# Altium PCB bee_hie_PCB.PcbDoc
Units mil, origin at the board's own origin, x right, y up, seen from the top; angles counter-clockwise.
Board outline 5575 x 5145 mil, 2 copper layers (Top Layer, Bottom Layer); 23 components, 20 nets, 106 pads, 0 vias.
Unrouted connection lines stored in the file: 49.
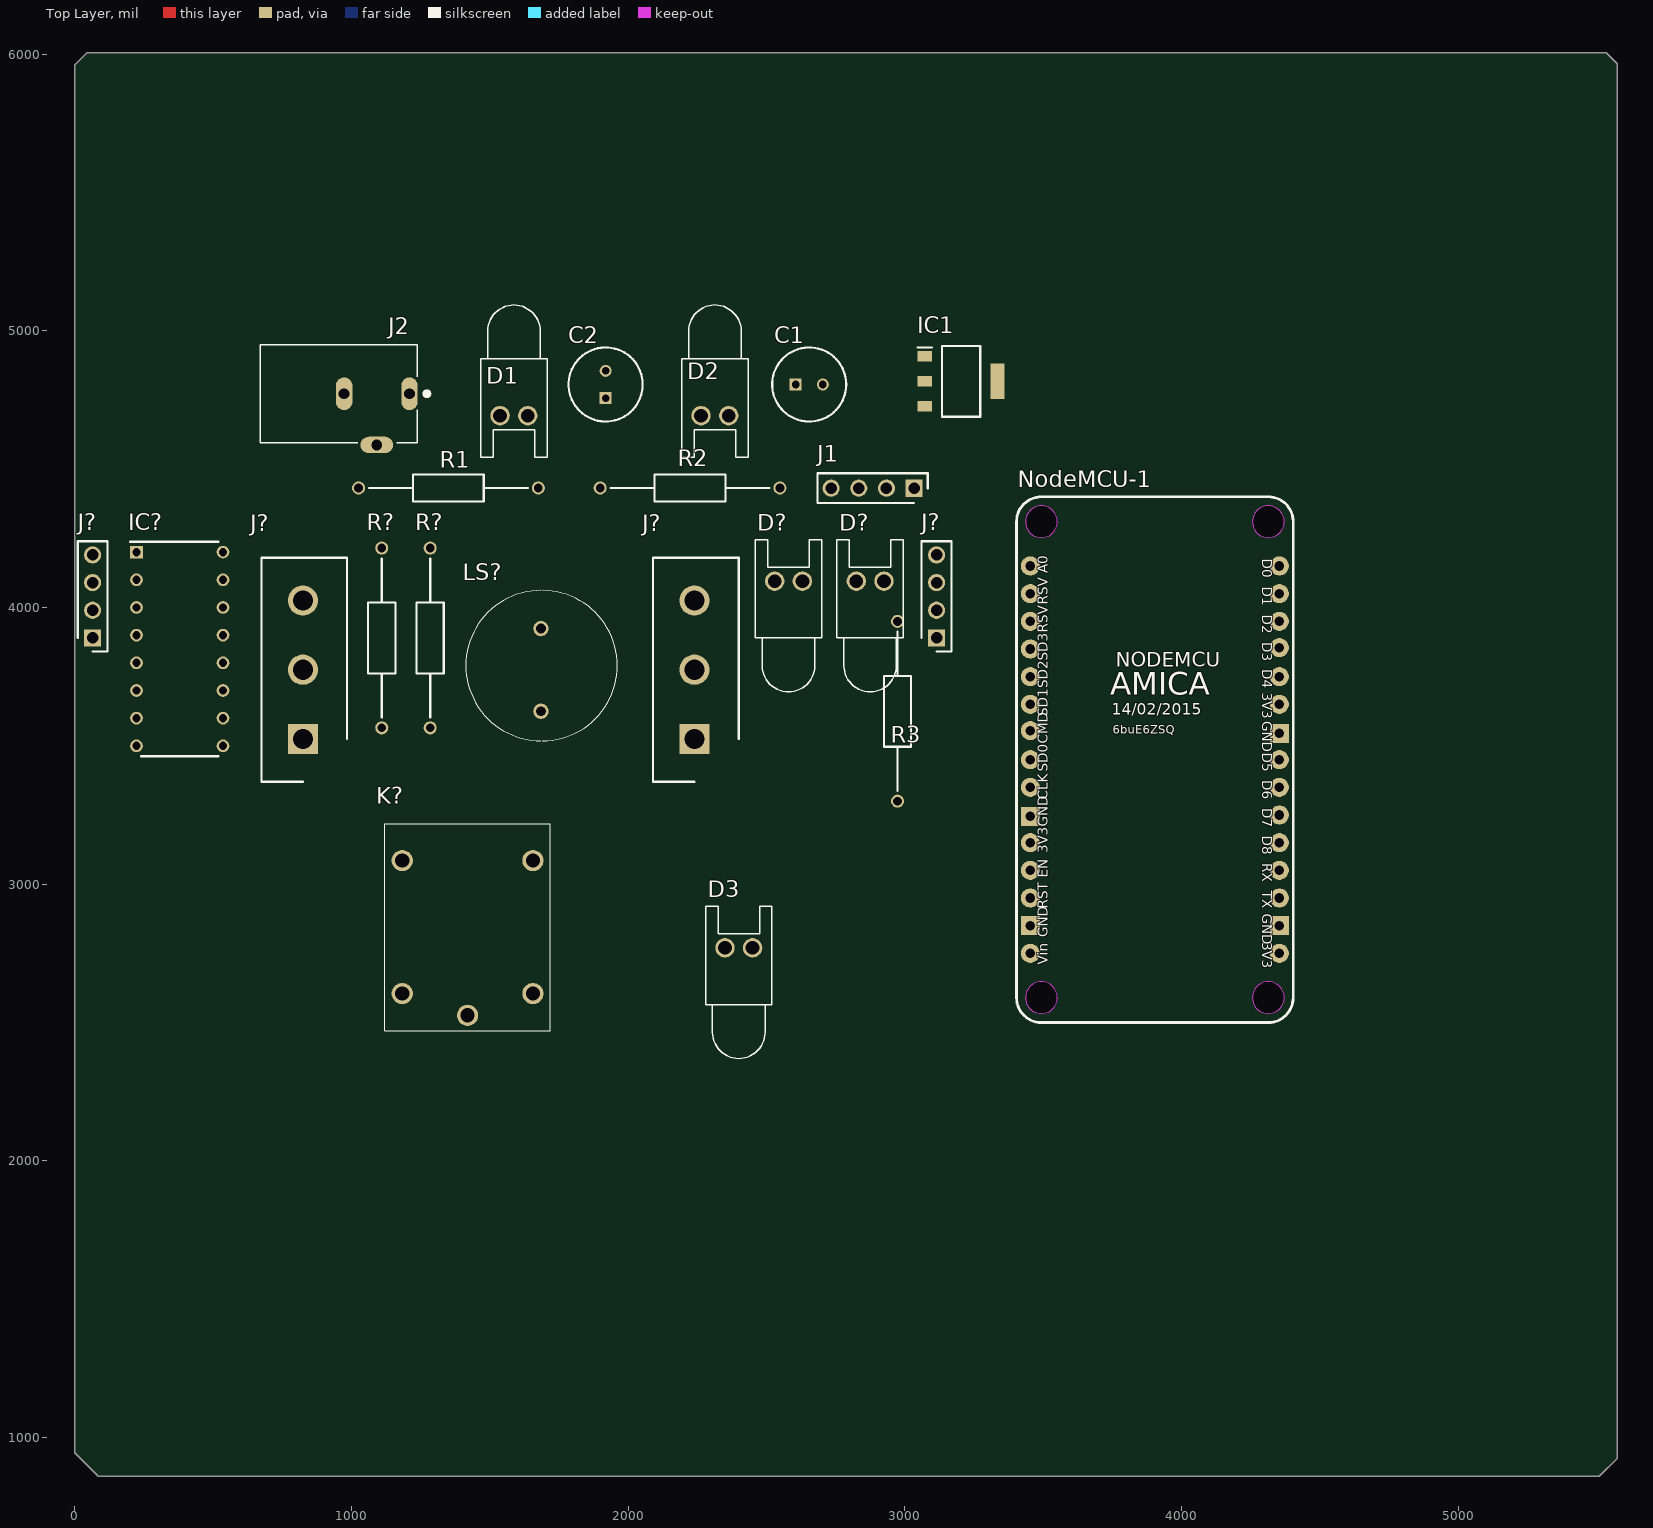
[diagram p0: Top Layer view]
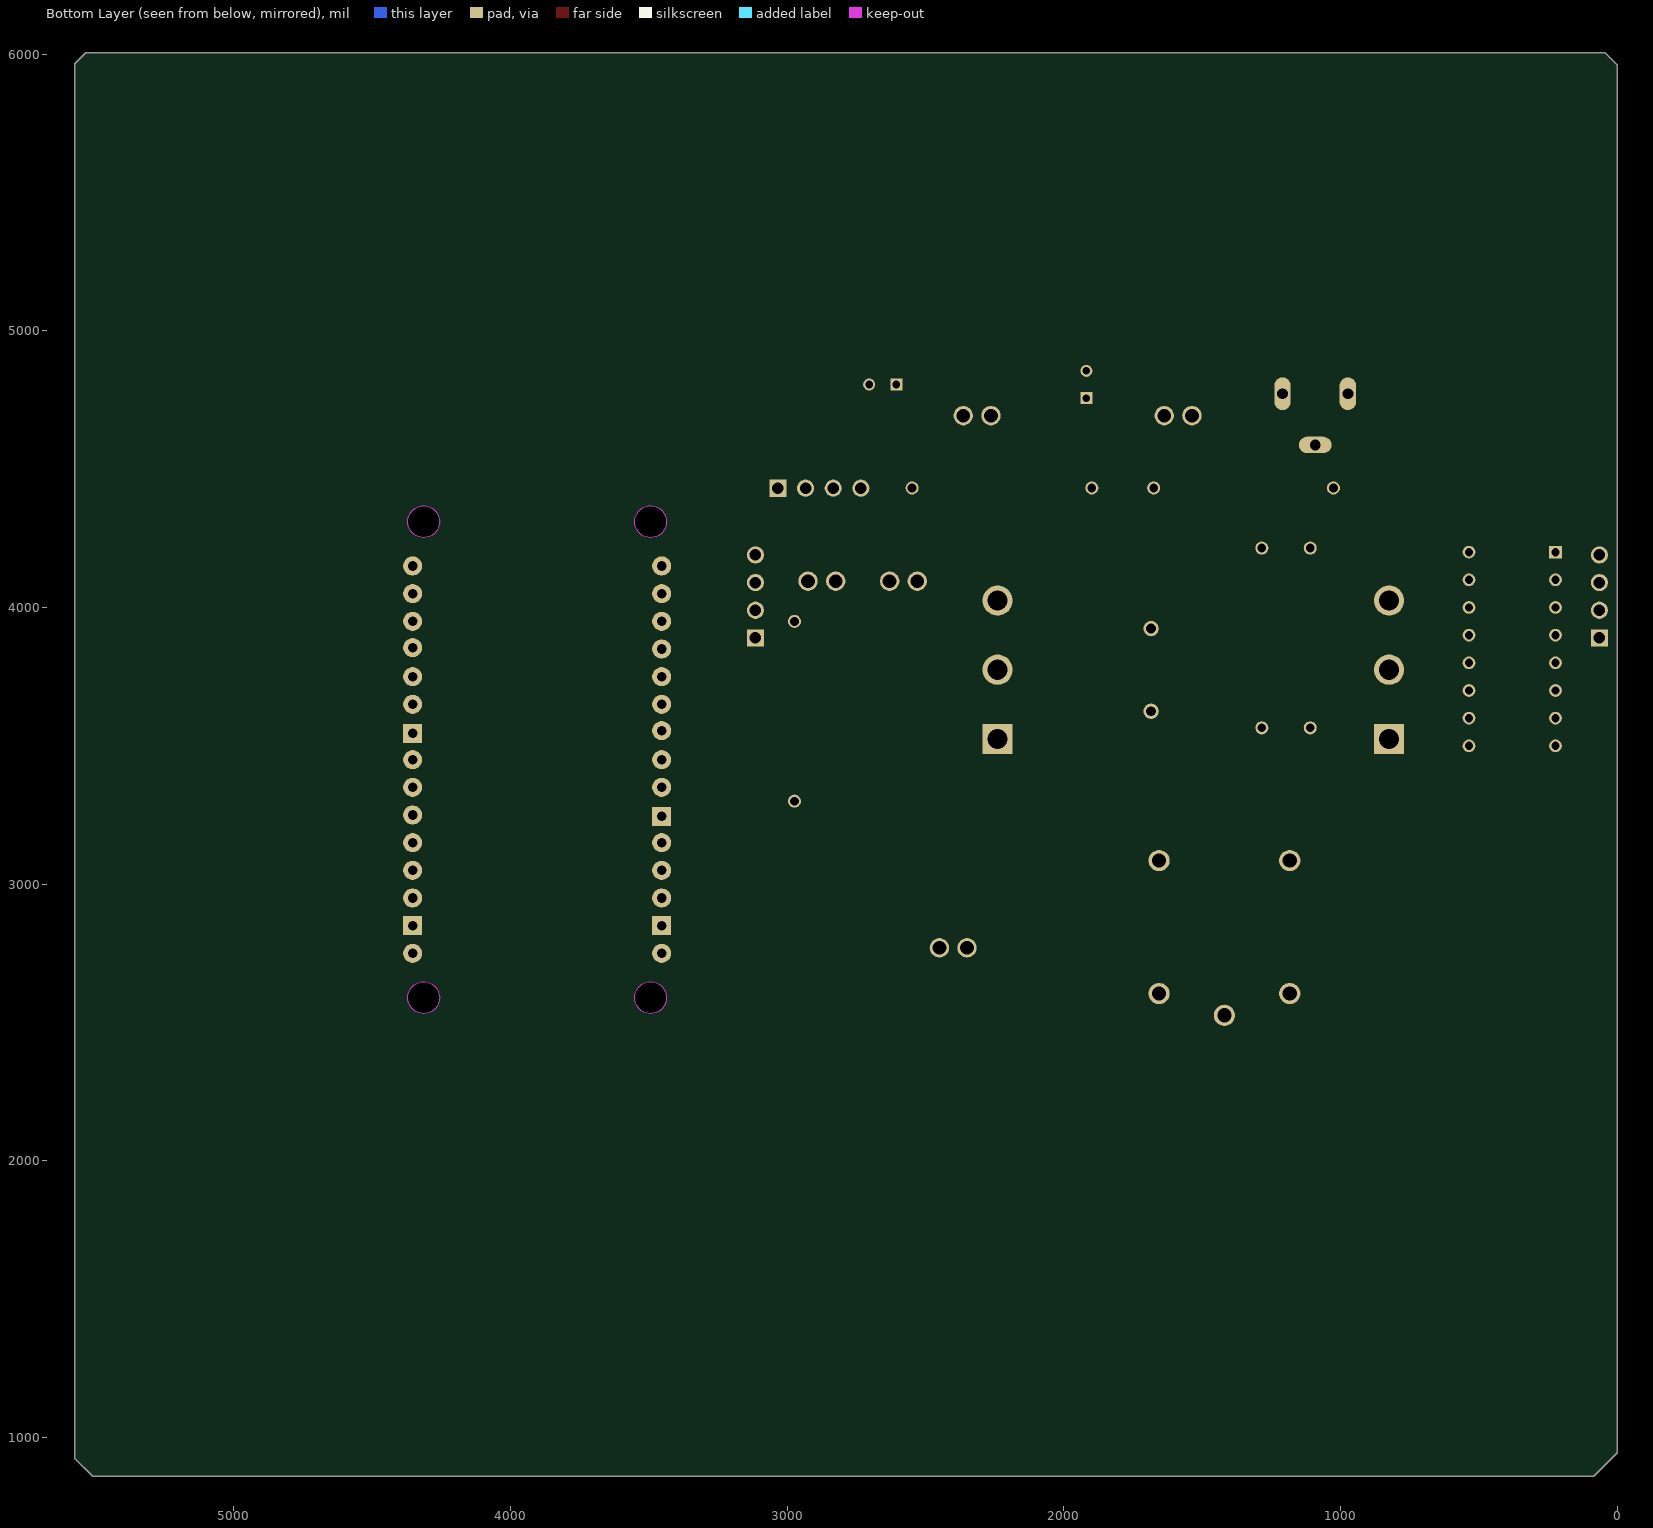
[diagram p1: Bottom Layer view, seen from below]

## Layer stack, top to bottom
Top Solder: solder mask 0.4, Solder Resist, Dk 3.5
Top Layer: signal copper 1.4
Dielectric 1: dielectric 12.6, FR-4, Dk 4.8
Bottom Layer: signal copper 1.4
Bottom Solder: solder mask 0.4, Solder Resist, Dk 3.5

## Board outline
0,945 85,860 5510,860 5575,925 5575,5965 5535,6005 45,6005 0,5960

## Design rules (kind name [scope] priority, off if disabled: settings)
Clearance [All] p1: gap=10 ignorepadtopadclearanceinfootprint=FALSE except(0: Arc-Hole Track-Hole SMDPad-Hole THPad-Hole Via-Hole Fill-Hole Poly-Hole Region-Hole Text-Hole)
PolygonConnect [All] p1: connectstyle=Relief reliefconductorwidth=10 reliefentries=4 polygonreliefangle="90 Angle" airgapwidth=10
RoomDefinition bee_hive_1 [InComponentClass('bee_hive_1')] p1: confinementstyle=ConfineIn formatcopy=TRUE lockcomponents=FALSE outline 4573.7,2405 8788.7,2405 8788.7,3630 4573.7,3630
RoutingVias [All] p1: holewidth=28 width=50 viastyle="Through Hole" minholewidth=28 minwidth=50 maxholewidth=28 maxwidth=50
SolderMaskExpansion [All] p1: expansion=4
Width [All] p1: maxlimit=10 minlimit=10 preferedwidth=10
30 further rules are at their usual default settings.

## Classes and differential pairs
component class bee_hive_1: C1 C2 D1 D2 D3 D? IC1 IC? J1 J2 J? K? LS? NodeMCU-1 R1 R2 R3 R?

## Components (designator, comment, footprint, x,y, rotation, side; value= is the part's Value field where it differs from the comment)
C1 "BKME500ELL100MF11D" CAPPRD250W50D680H1250 2605.28,4805.83 r0 top
C2 "BKME500ELL100MF11D" CAPPRD250W50D680H1250 1918.7,4756.61 r90 top
D1 "12v" LED-0 1587.48,4693.17 r180 top
D2 "5v" LED-0 2313.7,4693.17 r180 top
D3 "5v" LED-0 2400,2770 r0 top
D? "5v" LED-0 2874.76,4095 r0 top
D? "5v" LED-0 2579.76,4095 r0 top
IC1 "ams1117-3.3v" SOT229P700X180-4N 3203.7,4817.44 r0 top
IC? "ULN2003A" DIP794W56P254L1918H533Q16N 379.76,3850 r0 top
J1 "0022032041" HDRV4W87P0X254_1X4_991X236X1155P 3033.7,4431.04 r180 top
J2 "PJ-102B" *CUI_PJ-102B 954.02,4772.36 r180 top
J? "i2c" HDRV4W87P0X254_1X4_991X236X1155P 64.76,3890 r90 top
J? "a0_ip" SHDR3W166P0X635_1X3_2032X762X1422P 824.76,3525 r90 top
J? "ao_ip" SHDR3W166P0X635_1X3_2032X762X1422P 2239.76,3525 r90 top
J? "0022032041" HDRV4W87P0X254_1X4_991X236X1155P 3114.76,3890 r90 top
K? "0476618" 0476618 1420,2845 r90 top
LS? "254-15210-ROX" 25415210ROX 1685,3625 r270 top
NodeMCU-1 "NodeMCU V1.0 ESP-12E" "NodeMCU V1.0 ESP-12E" 3402.7,4396 r0 top
R1 "MRS25000C1000FCT00" RESAD1650W60L650D250 1025.93,4431.83 r0 top
R2 "MRS25000C1000FCT00" RESAD1650W60L650D250 1899.09,4431.83 r0 top
R3 "MRS25000C1000FCT00" RESAD1650W60L650D250 2973.7,3300 r90 top
R? "MRS25000C1000FCT00" RESAD1650W60L650D250 1109.76,3565 r90 top
R? "MRS25000C1000FCT00" RESAD1650W60L650D250 1284.76,3565 r90 top

## Footprints (in the part's own frame and the unit in brackets; to place one, negate y for a bottom-side part, rotate by r counter-clockwise, add the part's x,y. Pads: shape width x height; smd on the part's side, far side on the other; paste and mask are expansions set on the pad)
0476618 [mm]
  round 1.95 hole 1.3: 1(-6.1,-6) 2(6.1,-6) 3(6.1,6) 4(-6.1,6) 5(-8.1,0)
  silkscreen extent -9.5,-7.6 9.5,7.6, body extent -9.5,-7.6 9.5,7.6, height 15
25415210ROX [mm]
  round 1.417 hole 0.911: 1(0,0) 2(-7.59,0)
  silkscreen extent -11.09,-6.9 2.7,7.02
*CUI_PJ-102B [mm]
  oval 1.508x3.016 hole 1: 1(-6.5,0) 2(-0.5,0)
  oval 3.016x1.508 hole 1: 3(-3.5,4.7)
  silkscreen extent -8.3,-4.5 7.2,4.5, body extent -7.24,-4.52 7.16,4.88, height 11.01
CAPPRD250W50D680H1250 [mm]
  rect 1.1x1.1 hole 0.7: 1(0,0)
  round 1.1 hole 0.7: 2(2.5,0)
  silkscreen extent -2.15,-3.4 4.65,3.4, body extent -2.15,-3.4 4.65,3.4, height 12.5
DIP794W56P254L1918H533Q16N [mm]
  rect 1.16x1.16 hole 0.76: 1(-3.97,8.89)
  round 1.16 hole 0.76: 2(-3.97,6.35) 3(-3.97,3.81) 4(-3.97,1.27) 5(-3.97,-1.27) 6(-3.97,-3.81) 7(-3.97,-6.35) 8(-3.97,-8.89) 9(3.97,-8.89) 10(3.97,-6.35) 11(3.97,-3.81) 12(3.97,-1.27) 13(3.97,1.27) 14(3.97,3.81) 15(3.97,6.35) 16(3.97,8.89)
  silkscreen extent -4.55,-9.84 3.55,9.84, body extent -4.11,-9.59 4.11,9.59, height 5.33
HDRV4W87P0X254_1X4_991X236X1155P [mm]
  rect 1.575x1.575 hole 1.05: 1(0,0)
  round 1.575 hole 1.05: 2(2.54,0) 3(5.08,0) 4(7.62,0)
  silkscreen extent -1.24,-1.37 8.86,1.37, body extent -1.14,-1.18 8.76,1.18, height 11.55
LED-0 [mil] "LED; 2 Leads"
  round 70 hole 50: 1(50,0) 2(-50,0)
  silkscreen extent -120,-400 120,150
"NodeMCU V1.0 ESP-12E" [mil]
  round 115 hole 115 unplated paste-300 mask-300: 0(91,-1806) 0(91,-86) 0(911,-1806) 0(911,-86)
  round 69 hole 35: 3V3(51,-1246) 3V3(951,-1646) 3V3(951,-746) A0(51,-246) CLK(51,-1046) CMD(51,-841) D0(951,-246) D1(951,-346) D2(951,-446) D3(951,-541) D4(951,-646) D5(951,-946) D6(951,-1046) D7(951,-1146) D8(951,-1246) EN(51,-1346) RST(51,-1446) RSV(51,-446) RSV(51,-346) RX(951,-1346) SD0(51,-946) SD1(51,-746) SD2(51,-646) SD3(51,-546) TX(951,-1446) VIN(51,-1646)
  rect 69x69 hole 35: GND(51,-1546) GND(51,-1151) GND(951,-1546) GND(951,-851)
  Keep-Out Layer circle w2: c911,-1806 r57.5
  Keep-Out Layer circle w2: c91,-1806 r57.5
  Keep-Out Layer circle w2: c911,-86 r57.5
  Keep-Out Layer circle w2: c91,-86 r57.5
  silkscreen extent 1,-1896 1001,4
RESAD1650W60L650D250 [mm]
  round 1.2 hole 0.8: 1(0,0) 2(16.5,0)
  silkscreen extent 0.95,-1.25 15.55,1.25, body extent -0.3,-1.25 16.8,1.25, height 2.49
SHDR3W166P0X635_1X3_2032X762X1422P [mm]
  rect 2.775x2.775 hole 1.85: 1(0,0)
  round 2.775 hole 1.85: 2(6.35,0) 3(12.7,0)
  silkscreen extent -3.94,-4.06 16.63,3.81, body extent -5.59,-3.81 18.29,5.08, height 13.98
SOT229P700X180-4N [mm]
  rect 1.3x0.95 smd: 1(-3.35,2.29) 2(-3.35,0) 3(-3.35,-2.29)
  rect 1.3x3.25 smd: 4(3.35,0)
  silkscreen extent -4,-3.25 1.75,3.25, body extent -3.5,-3.25 3.5,3.25, height 1.8

## Part data
C1 C2: "Capacitor Polarised", Manufacturer_Name="United Chemi-Con", Mouser Part Number=661-BKME500ELL100MF1, Datasheet Link=http://www.mouser.com/datasheet/2/420/al-kmebp-e-140701-514734.pdf, Height=12.5mm, Manufacturer_Part_Number=BKME500ELL100MF11D, Mouser Price/Stock=https://www.mouser.com/Search/Refine.aspx?Keyword=661-BKME500ELL100MF1
D1 D2 D3 D? D?: library part LED0, "Typical INFRARED GaAs LED", LatestRevisionDate=08-Jul-2005, LatestRevisionNote="Mech Layer 1 removed.", PackageDescription="LED; 2 Leads", PackageReference=LED-0, Published=8-Jun-2000, Publisher="Altium Limited"
IC1: "Integrated Circuit", Manufacturer_Name="Advanced Monolithic Systems", Datasheet Link=http://www.advanced-monolithic.com/pdf/ds1117.pdf, Height=1.8mm, Manufacturer_Part_Number=ams1117-3.3v
IC?: "Integrated Circuit", Manufacturer_Name=STMicroelectronics, Mouser Part Number=511-ULN2003A, RS Part Number=6868209, Allied_Number=70014189, Allied Price/Stock=http://www.alliedelec.com/stmicroelectronics-uln2003a/70014189/, Datasheet Link=http://www.st.com/web/en/resource/technical/document/datasheet/CD00001244.pdf, Height=5.33mm, Manufacturer_Part_Number=ULN2003A, Mouser Price/Stock=https://www.mouser.com/Search/Refine.aspx?Keyword=511-ULN2003A, RS Price/Stock=http://uk.rs-online.com/web/p/products/6868209
J1 J?: "Connector", Manufacturer_Name=Molex, Mouser Part Number=N/A, Datasheet Link=http://www.molex.com/pdm_docs/sd/022032041_sd.pdf, Height=11.55mm, Manufacturer_Part_Number=0022032041, Mouser Price/Stock=https://www.mouser.com/Search/Refine.aspx?Keyword=N%2FA
J?: library part 0022032041, "Connector", Manufacturer_Name=Molex, Mouser Part Number=N/A, Datasheet Link=http://www.molex.com/pdm_docs/sd/022032041_sd.pdf, Height=11.55mm, Manufacturer_Part_Number=0022032041, Mouser Price/Stock=https://www.mouser.com/Search/Refine.aspx?Keyword=N%2FA
J? J?: library part 0010844030, "Connector", Manufacturer_Name=Molex, Mouser Part Number=N/A, Datasheet Link=https://www.molex.com/pdm_docs/sd/010844020_sd.pdf, Height=14.22mm, Manufacturer_Part_Number=0010844030, Mouser Price/Stock=https://www.mouser.com/Search/Refine.aspx?Keyword=N%2FA
K?: "Relay or Contactor", Manufacturer_Name="RS Components", Datasheet Link=https://docs-emea.rs-online.com/webdocs/1583/0900766b81583163.pdf, Height=15mm, Manufacturer_Part_Number=0476618
LS?: "Loudspeaker or Buzzer", Manufacturer_Name=Kobitone, Datasheet Link=https://www.mouser.de/datasheet/2/209/KT-400269-1172018.pdf, Height=8.51mm, Manufacturer_Part_Number=254-15210-ROX
NodeMCU-1: "NodeMCU V1.0 ESP8266 (ESP-12E)"
R1 R2 R3 R? R?: "Resistor", Manufacturer_Name=Vishay, Mouser Part Number=594-MRS25000C1000FCT, Datasheet Link=http://www.vishay.com/docs/28724/mrs16m25.pdf, Manufacturer_Part_Number=MRS25000C1000FCT00, Mouser Price/Stock=https://www.mouser.com/Search/Refine.aspx?Keyword=594-MRS25000C1000FCT

## Nets (pads, with @x,y where several pads share a name; then routed paths per layer and width w, separated by ;. In a path a pad name is that pad's centre, name@x,y a point inside that pad or via, vN(x,y) a via of type N, cw(c..) or ccw(c..) an arc to the next point about the centre after c; other vN are vias at no path point)
+5: C2.1 D2.1 IC1.2 IC1.4 J1.2 J1.3 J?.1@64.76,3890 J?.1@824.76,3525 J?.1@2239.76,3525 NodeMCU-1.VIN
GND: C1.2 C2.2 IC1.1 IC?.8 J1.4 J2.2 J2.3 J?.3@824.76,4025 J?.3@2239.76,4025 J?.4@64.76,4190 NodeMCU-1.GND R1.1 R2.1 R3.1
NetD1_2: D1.2 R1.2
NetD2_2: D2.2 R2.2
NetD3_1: D3.1 NodeMCU-1.3V3
NetD3_2: D3.2 R3.2
NetD?_1: D?.1@2924.76,4095 R?.2@1284.76,4214.61
NetD?_2: D?.2@2529.76,4095 IC?.15 J?.1@3114.76,3890
NetIC?_1: IC?.1 NodeMCU-1.D0
NetIC?_2: IC?.2
NetIC?_3: IC?.3
NetIC?_4: IC?.4
NetIC?_5: IC?.5
NetIC?_12: IC?.12 J?.4@3114.76,4190
NetIC?_13: IC?.13 J?.3@3114.76,4090 LS?.2
NetIC?_16: IC?.16 K?.1
NetJ?_2: J?.2@2239.76,3775
NetJ?_3: J?.3@64.76,4090
NetK?_5: K?.5 NodeMCU-1.A0
VCC: C1.1 D1.1 IC1.3 IC?.9 J1.1 J2.1 K?.4 LS?.1 R?.1
pads on no net: D?.1@2629.76,4095 D?.2@2824.76,4095 IC?.6 IC?.7 IC?.10 IC?.11 IC?.14 J?.2@64.76,3990 J?.2@824.76,3775 J?.2@3114.76,3990 K?.2 K?.3 NodeMCU-1.0 NodeMCU-1.CLK NodeMCU-1.CMD NodeMCU-1.D1 NodeMCU-1.D2 NodeMCU-1.D3 NodeMCU-1.D4 NodeMCU-1.D5 NodeMCU-1.D6 NodeMCU-1.D7 NodeMCU-1.D8 NodeMCU-1.EN NodeMCU-1.RST NodeMCU-1.RSV NodeMCU-1.RX NodeMCU-1.SD0 NodeMCU-1.SD1 NodeMCU-1.SD2 NodeMCU-1.SD3 NodeMCU-1.TX R?.2@1109.76,4214.61

## Text inside footprints (layer, text, board x,y; h text height)
NodeMCU-1: Top Overlay "14/02/2015" at 3747.7,3598 h69; Top Overlay "AMICA" at 3741.7,3657 h140; Top Overlay "NODEMCU" at 3762.7,3767 h90; Top Overlay "6buE6ZSQ" at 3751.7,3543 h30; Top Overlay "CLK" at 3528.7,3306 h60 r90; Top Overlay "SD0" at 3528.7,3406.43 h60 r90; Top Overlay "SD1" at 3528.7,3607.29 h60 r90; Top Overlay "SD2" at 3528.7,3707.71 h60 r90; Top Overlay "SD3" at 3528.7,3808.14 h60 r90; Top Overlay "RSV" at 3528.7,3908.57 h60 r90; Top Overlay "RSV" at 3528.7,4009 h60 r90; Top Overlay "A0" at 3528.7,4123 h60 r90; Top Overlay "D5" at 4278.7,3475 h60 r270; Top Overlay "GND" at 4278.7,3589 h60 r270; Top Overlay "3V3" at 4278.7,3690.99 h60 r270; Top Overlay "D4" at 4278.7,3776 h60 r270; Top Overlay "D3" at 4278.7,3874.42 h60 r270; Top Overlay "D2" at 4278.7,3974.42 h60 r270; Top Overlay "D1" at 4278.7,4074.65 h60 r270; Top Overlay "D0" at 4278.7,4176 h60 r270; Top Overlay "CMD" at 3528.7,3506.86 h60 r90; Top Overlay "D6" at 4278.7,3375.88 h60 r270; Top Overlay "3V3" at 4278.7,2790 h60 r270; Top Overlay "GND" at 4278.7,2893.8 h60 r270; Top Overlay "TX" at 4278.7,2977 h60 r270; Top Overlay "RX" at 4278.7,3075.94 h60 r270; Top Overlay "D8" at 4278.7,3174.89 h60 r270; Top Overlay "D7" at 4278.7,3274.77 h60 r270; Top Overlay "Vin" at 3528.7,2709 h60 r90; Top Overlay "GND" at 3528.7,2809 h60 r90; Top Overlay "RST" at 3528.7,2912 h60 r90; Top Overlay "EN" at 3528.7,3024 h60 r90; Top Overlay "3V3" at 3528.7,3111 h60 r90; Top Overlay "GND" at 3528.7,3208 h60 r90